# Altium PCB INS_CAN.PcbDoc
Units mil, origin at the board's own origin, x right, y up, seen from the top; angles counter-clockwise.
Board outline 1181.1 x 1181.1 mil, 2 copper layers (Top Layer, Bottom Layer), stack 62.992 mil thick; 50 components, 37 nets, 209 pads, 111 vias.
Unrouted connection lines stored in the file: 32.
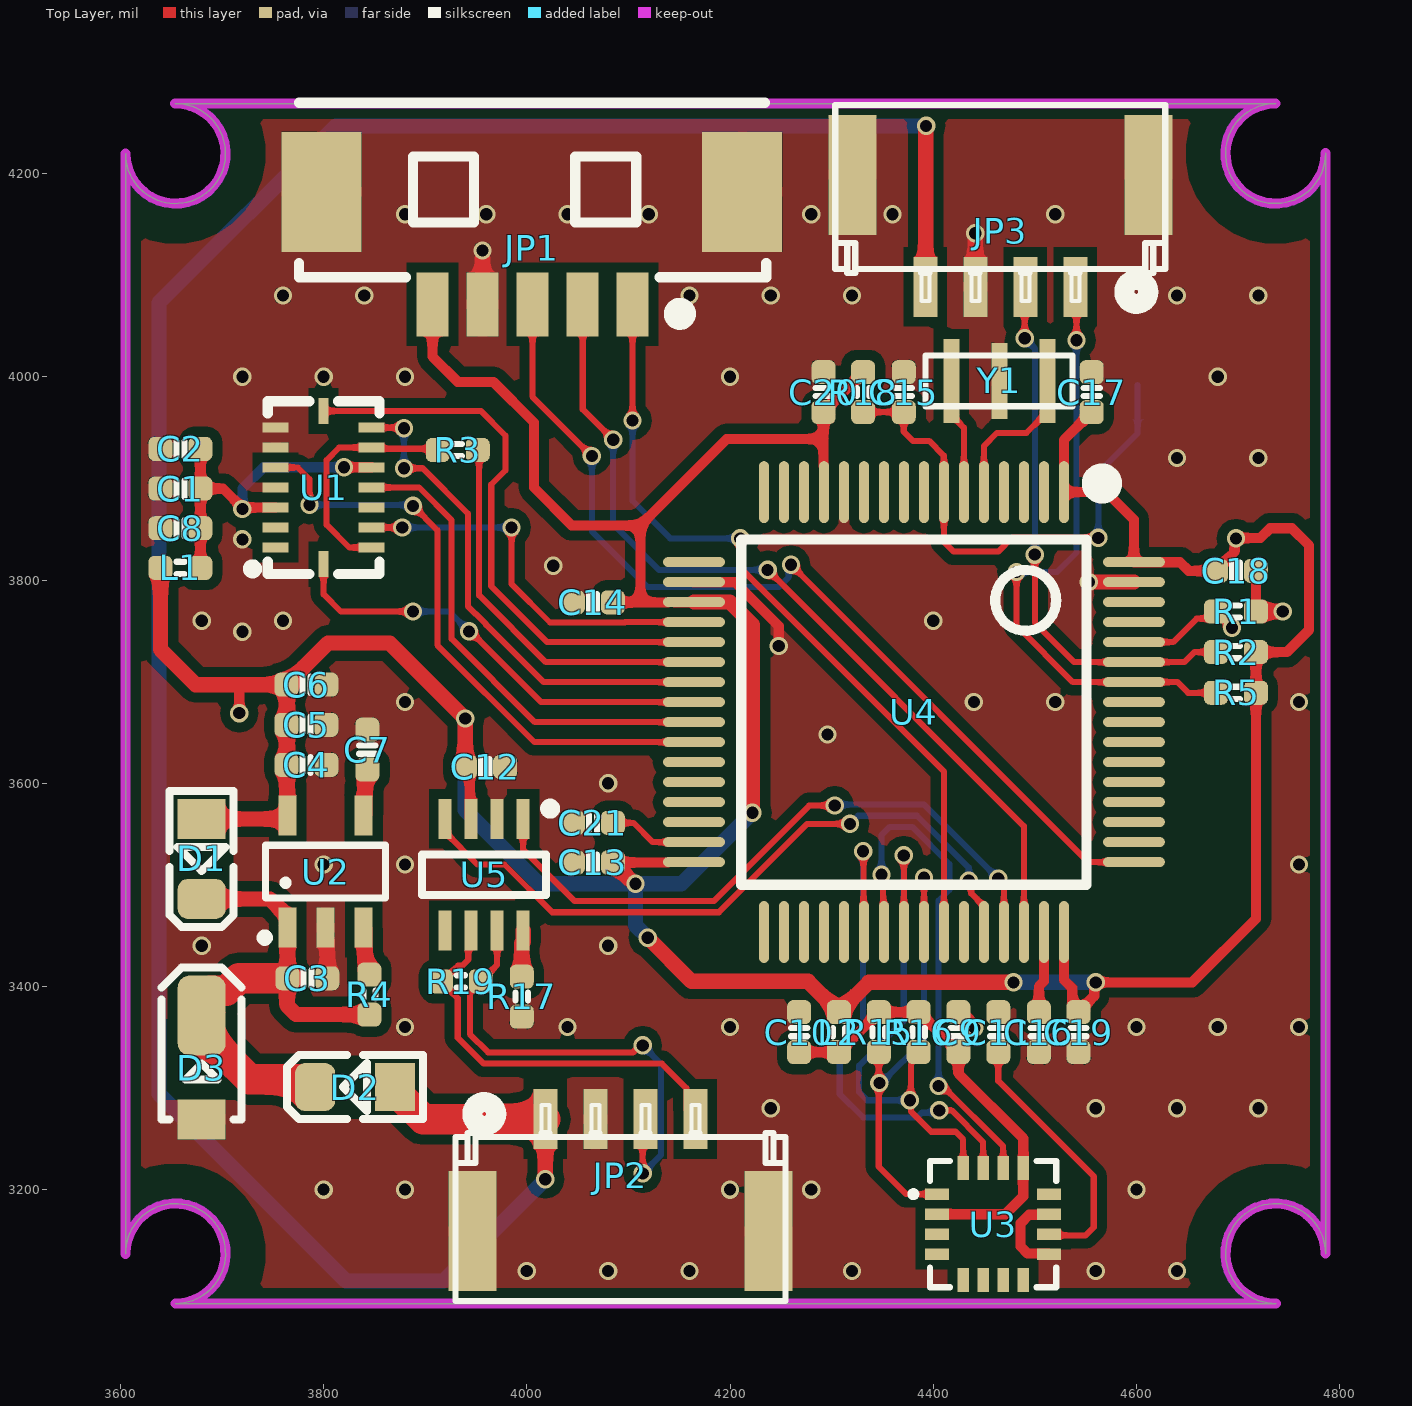
[diagram p0: Top Layer view]
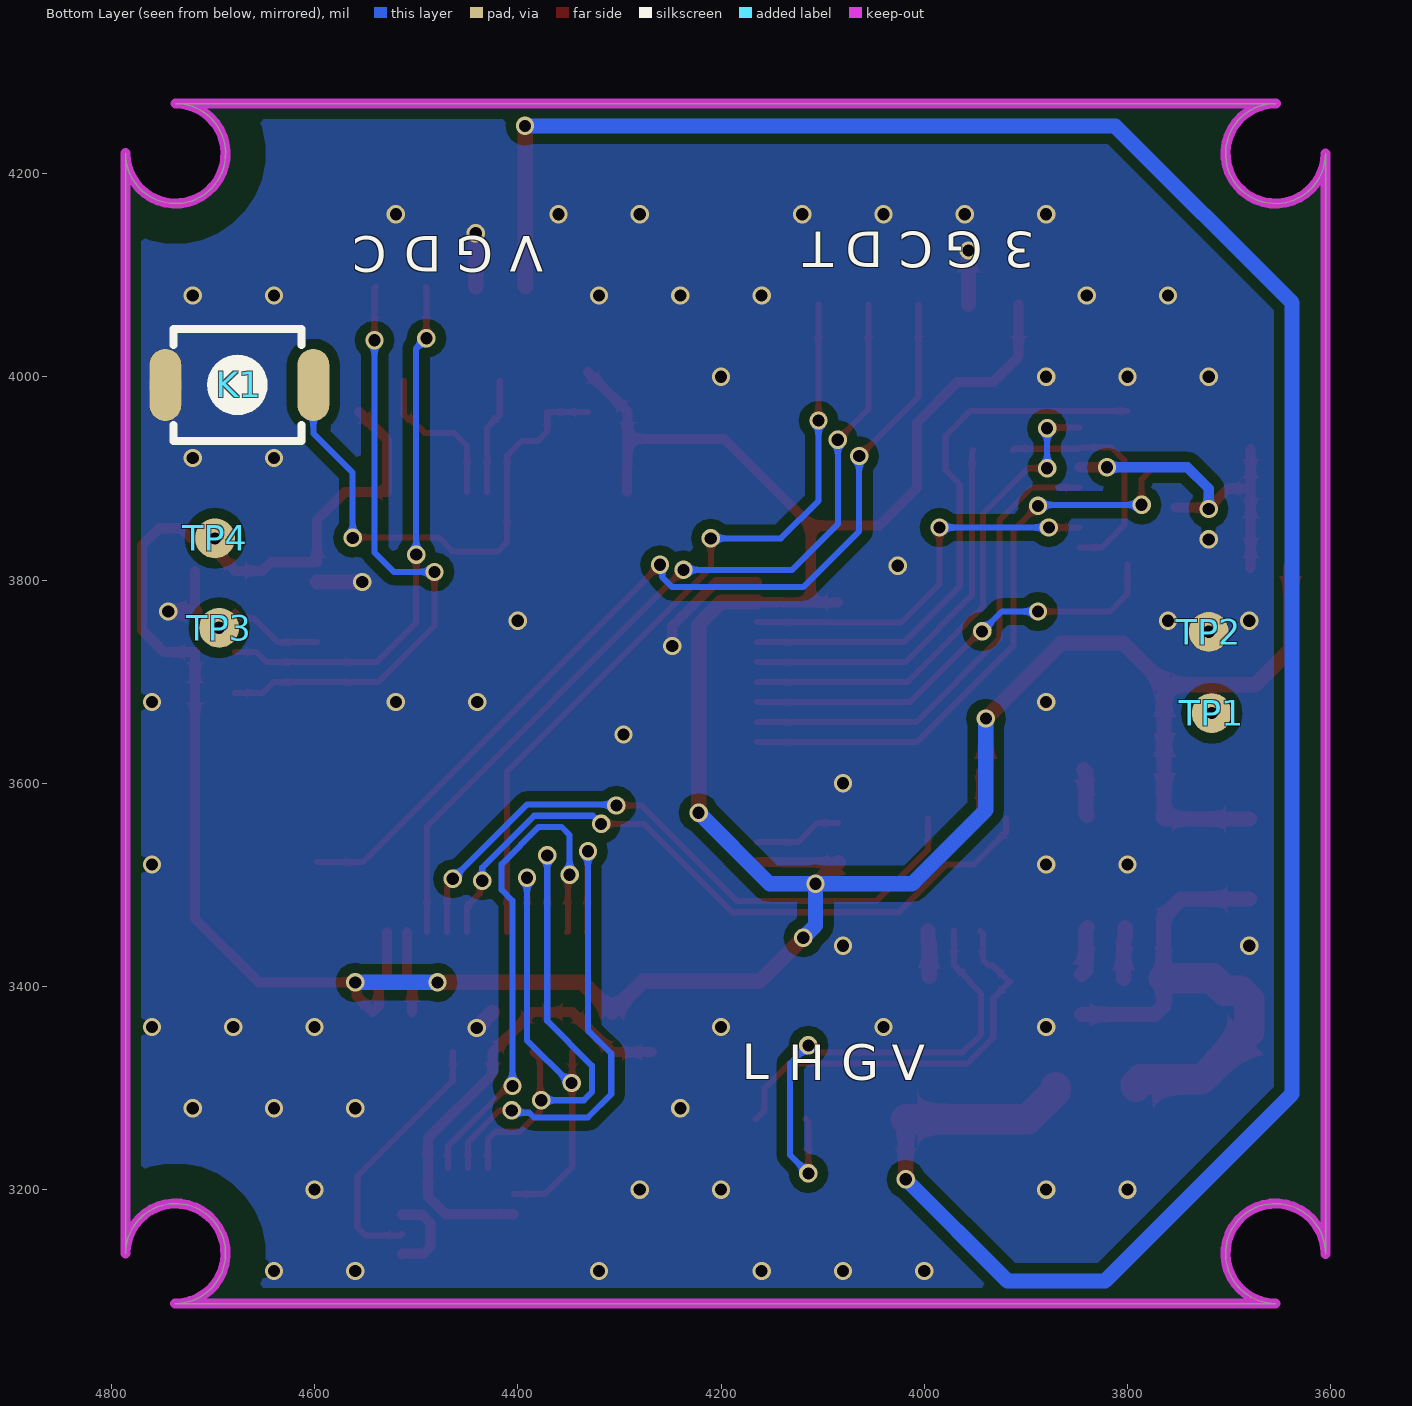
[diagram p1: Bottom Layer view, seen from below]
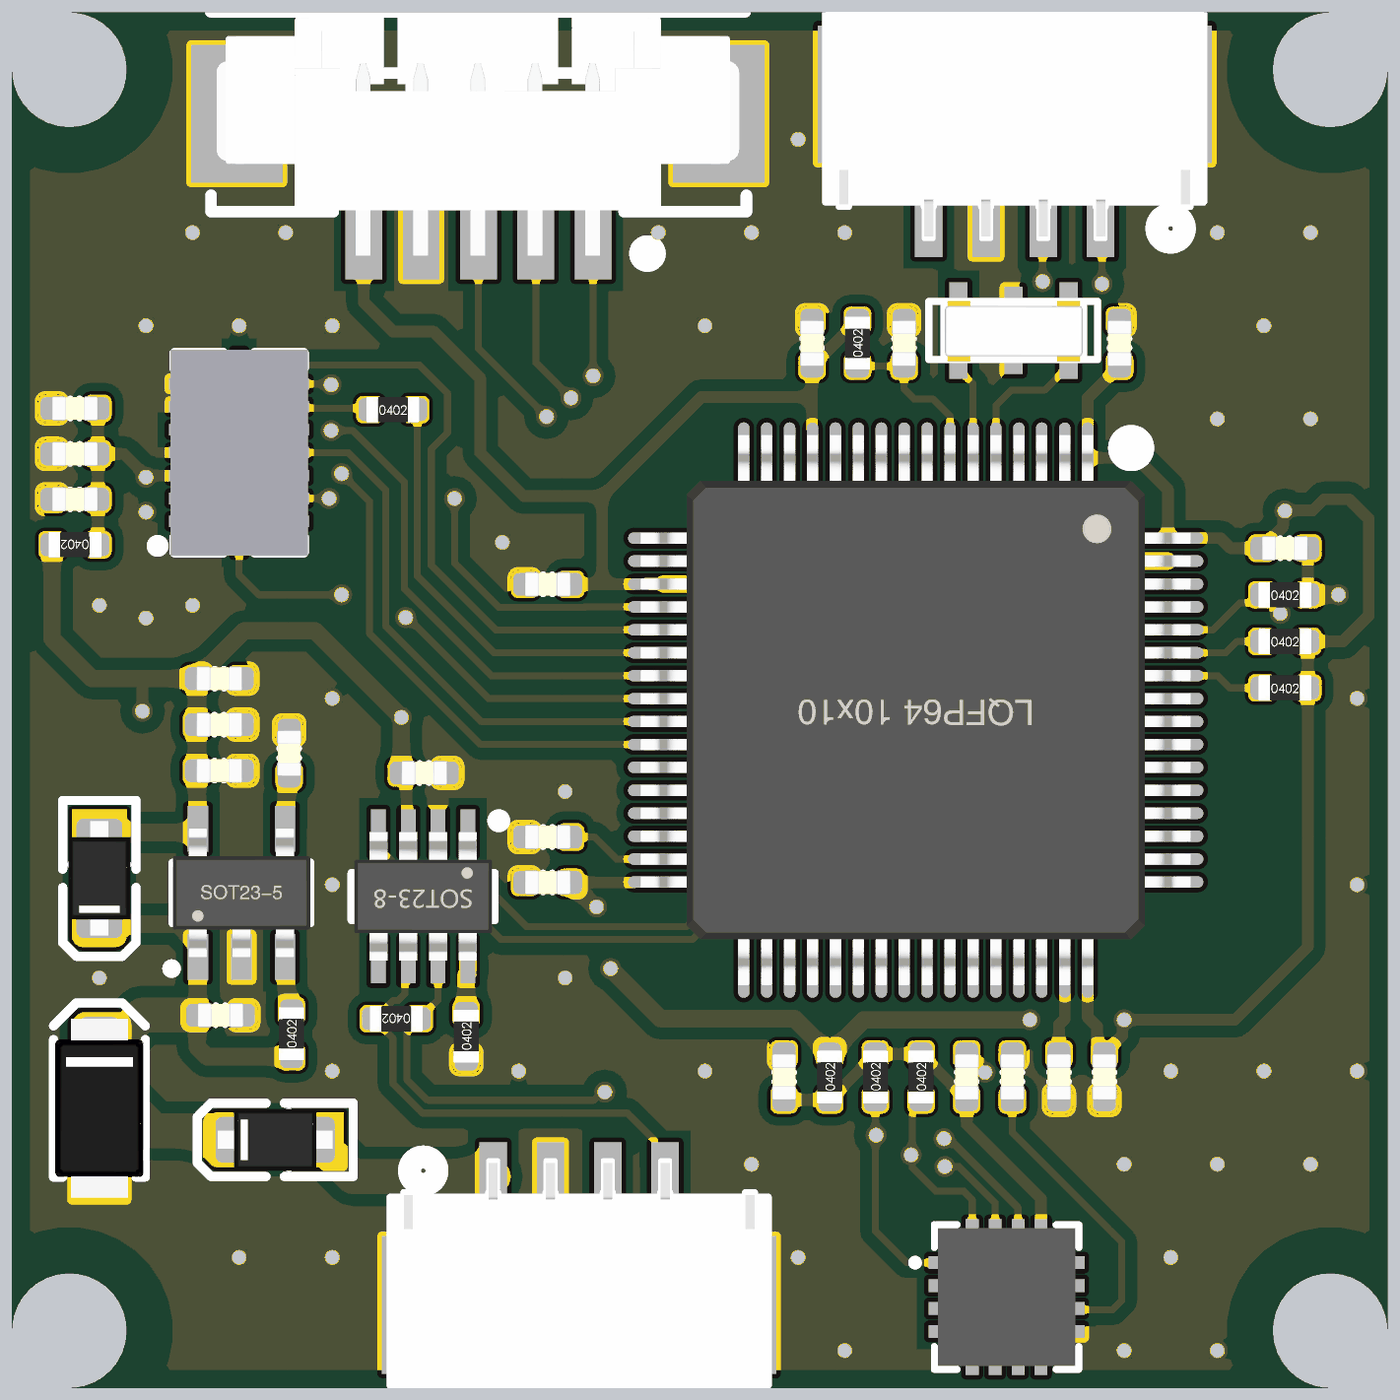
[diagram p2: 3D render of the assembled board from above, using the file's embedded part models]

## Layer stack, top to bottom
Top Solder: solder mask 0.4, Solder Resist, Dk 3.5
Top Layer: signal copper 1.9685
Dielectric 1: dielectric 59.0551, FR-4, Dk 4.8
Bottom Layer: signal copper 1.9685
Bottom Solder: solder mask 0.4, Solder Resist, Dk 3.5

## Board outline
3605,3136.9 3605,4219.79 ccw(c3654.21,4219.79) 3654,4269 4736.89,4269 ccw(c4736.89,4219.79) 4786.1,4220 4786.1,3137.11 ccw(c4736.89,3137.11) 4737.1,3087.9 3654.21,3087.9 ccw(c3654.21,3137.11)

## Design rules (kind name [scope] priority, off if disabled: settings)
AssemblyTestPointUsage [All] p1 off:
AssemblyTestpoint [All] p1 off: testpointundercomponent=TRUE minsize=40 maxsize=100 preferedsize=60 minholesize=0 maxholesize=40 preferedholesize=32 testpointgrid=1 usegrid=TRUE gridtolerance=0.01 allowsidetop=TRUE allowsidebottom=TRUE
Clearance Clearance_1 [InPolygon] p1: gap=10 ignorepadtopadclearanceinfootprint=FALSE
Clearance [All] p2: gap=5 ignorepadtopadclearanceinfootprint=FALSE
ComponentClearance [All] p1 off: gap=10 collisioncheckmode=3 verticalgap=10 showdistances=FALSE
DiffPairsRouting [All] p1 off: maxlimit=10 minlimit=6 mostfreqgap=6 toplayer_minwidth=6 toplayer_maxwidth=15 toplayer_prefwidth=6 bottomlayer_minwidth=6 bottomlayer_maxwidth=15 bottomlayer_prefwidth=6 maxuncoupledlength=500
FabricationTestPointUsage [All] p1 off: valid=0 allowmultiple=FALSE
FabricationTestpoint [All] p1 off: side=3 testpointundercomponent=TRUE minsize=40 maxsize=100 preferedsize=60 minholesize=0 maxholesize=40 preferedholesize=32 testpointgrid=1 allowsidetop=TRUE allowsidebottom=TRUE usegrid=TRUE gridtolerance=0.01
FanoutControl Fanout_BGA [IsBGA] p1 off: bgadir=Out bgaviamode=Centered fanoutstyle=Auto fanoutdirection=Alternating viagrid=1 // Fanout_BGA (Default Rule)
FanoutControl Fanout_LCC [IsLCC] p2 off: bgadir=Out bgaviamode=Centered fanoutstyle=Auto fanoutdirection=Alternating viagrid=1 // Fanout_LCC (Default Rule)
FanoutControl Fanout_SOIC [IsSOIC] p3 off: bgadir=Out bgaviamode=Centered fanoutstyle=Auto fanoutdirection=Alternating viagrid=1 // Fanout_SOIC (Default Rule)
FanoutControl Fanout_Small [(CompPinCount < 5)] p4 off: bgadir=Out bgaviamode=Centered fanoutstyle=Auto fanoutdirection=OutThenIn viagrid=1 // Fanout_Small (Default Rule)
FanoutControl Fanout_Default [All] p5 off: bgadir=Out bgaviamode=Centered fanoutstyle=Auto fanoutdirection=Alternating viagrid=1 // Fanout_Default (Default Rule)
Height [All] p1 off: minheight=0 maxheight=1000 prefheight=500
HoleSize [All] p1 off: absolutevalues=TRUE maxlimit=100 minlimit=1 maxpercent=80.000 minpercent=20.000
HoleToHoleClearance [All] p1 off: gap=10 allowstackedmicrovias=TRUE
LayerPairs [All] p1 off: enforce=TRUE
MinimumSolderMaskSliver [All] p1 off: minsoldermaskwidth=10
NetAntennae [All] p1 off: netantennaetolerance=0
PasteMaskExpansion [All] p1 off: expansion=0
PlaneClearance [All] p1 off: clearance=30
PlaneConnect [All] p1 off: planeconnectstyle=Direct reliefexpansion=10 reliefentries=4 reliefconductorwidth=10 reliefairgap=5
PolygonConnect [All] p1 off: connectstyle=Direct reliefconductorwidth=10 reliefentries=4 polygonreliefangle="90 Angle" airgapwidth=10
RoutingCorners [All] p1 off: cornerstyle=45-Degree minsetback=100 maxsetback=100
RoutingLayers [All] p1 off: top layer_v5=TRUE bottom layer_v5=TRUE
RoutingPriority [All] p1 off: routingpriority=0
RoutingTopology [All] p1 off: topology=Shortest
RoutingVias [All] p1 off: holewidth=10 width=18 viastyle="Through Hole" minholewidth=5 minwidth=5 maxholewidth=100 maxwidth=100
SilkToSilkClearance [All] p1 off: silktosilkclearance=10
SilkToSolderMaskClearance [IsPad] p1 off: minsilkscreentomaskgap=10 clearancetoexposedcopper=TRUE
SolderMaskExpansion [All] p1 off: expansion=4 istentingtop=FALSE
Width [All] p1 off: maxlimit=1000 minlimit=5 preferedwidth=10
4 further rules are at their usual default settings.

## Components (designator, comment, footprint, x,y, rotation, side; value= is the part's Value field where it differs from the comment)
C1 "10uF" C0402 3659,3890 r180 top value=0.1u
C2 "0.1uF" C0402 3659,3929 r180 top value=0.1u
C3 "1uF/25V" C0402 3784,3408 r180 top value=0.1u
C4 "0.1uF/50V" C0402 3783,3618 r180 top value=0.1u
C5 "1uF/25V" C0402 3783,3657.5 r180 top value=0.1u
C6 "0.1uF/50V" C0402 3783,3697 r180 top value=0.1u
C7 "10nF/50V" C0402 3843,3633 r270 top value=0.1u
C8 "0.1uF" C0402 3659,3851 r180 top value=0.1u
C9 "0.1uF" C0402 4424.8,3355 r90 top value=0.1u
C10 "0.1uF" C0402 4268,3355 r90 top value=0.1u
C11 "4.7uF" C0402 4464,3355 r90 top value=0.1u
C12 "0.1uF/50V" C0402 3959,3616 r180 top value=0.1u
C13 "0.1uF" C0402 4065,3522 r180 top value=0.1u
C14 "0.1uF" C0402 4065,3778 r180 top value=0.1u
C15 "0.1uF/50V" C0402 4371,3985 r270 top value=0.1u
C16 "2.2uF" C0402 4504,3355 r270 top value=0.1u
C17 "0.1uF" C0402 4556,3985 r90 top value=0.1u
C18 "0.1uF" C0402 4698,3809 r0 top value=0.1u
C19 "0.1uF" C0402 4543,3355 r270 top value=0.1u
C20 "0.1uF" C0402 4292,3985 r90 top value=0.1u
C21 "2.2uF" C0402 4065,3561 r180 top value=0.1u
D1 "1N5819" D_SOD323 3680,3525.5 r270 top
D2 "1N5819" D_SOD323 3831,3301 r180 top
D3 "SMFJ5.0A" D_SOD123A 3680,3328 r90 top
JP1 "HDR-1X5" "MX 1.25-WS-5P" 4005,4182 r180 top
JP2 "SWD" GH1.25-WS-4P 4092,3171 r180 top
JP3 "SWD" GH1.25-WS-4P 4466,4187 r0 top
K1 "6x6x5" SWPBS_SPST_3X2X1 4676,3992 r180 bottom
L1 "60R 25% 3A" R0402 3659,3812 r180 top
L2 "60R 25% 3A" R0402 4307.2,3355 r90 top
R1 "10K" R0402 4698,3769 r0 top value=22R
R2 "4.7K" R0402 4698,3729 r0 top value=22R
R3 "33R" R0402 3932,3928 r0 top value=22R
R4 "100K" R0402 3845,3392 r90 top value=22R
R5 "4.7K" R0402 4698,3689 r0 top value=22R
R15 "4.7K" R0402 4346.4,3355 r90 top value=22R
R16 "4.7K" R0402 4385.6,3355 r90 top value=22R
R17 "0R" R0402 3995,3390 r90 top value=22R
R18 "10K" R0402 4331,3985 r90 top value=22R
R19 "120R/NC" R0402 3935,3405 r180 top value=22R
TP1 "TEST" "TEST 1" 3717,3669 r270 bottom
TP2 "TEST" "TEST 1" 3720,3749 r270 bottom
TP3 "TEST" "TEST 1" 4694,3753 r0 bottom
TP4 "TEST" "TEST 1" 4698,3841 r0 bottom
U1 "BMI088" "QFN16 BMI" 3800,3891 r0 top
U2 "LP5907 3V3" SOT23-5L 3802,3513 r0 top
U3 "IST8310" QFN50_16T_3X3_IST 4459,3166 r270 top
U4 "STM32F405RGT6V" "LQFP64 10x10_L" 4381,3670 r180 top
U5 "MAX3051EKA+T" SOT23-8L 3958,3510 r180 top
Y1 "8MHz" CSTCE3213 4437.24,3921 r270 top

## Footprints (in the part's own frame and the unit in brackets; to place one, negate y for a bottom-side part, rotate by r counter-clockwise, add the part's x,y. Pads: shape width x height; smd on the part's side, far side on the other; paste and mask are expansions set on the pad)
C0402 [mm] "CHIP Capacitor, 1.0X0.5mm, 0402"
  rrect50% 0.6x0.6 smd paste-0.05 mask+0.075: 1(-0.5,0) 2(0.5,0)
  silkscreen extent -0.1,-0.2 0.1,0.2, body extent -0.5,-0.26 0.5,0.27, height 0.36
CSTCE3213 [mm]
  rect 2.1x0.4 smd: 1(-1.905,1.905) 3(-1.905,-0.495)
  rect 1.9x0.4 smd: 2(-1.905,0.705)
  silkscreen extent -2.54,-1.14 -1.27,2.54, body extent -2.55,-0.89 -1.23,2.31, height 0.9
D_SOD123A [mm] "PowerDI-123, SOD123, DO-213AA, 1206D"
  rect 1x1.2 smd paste-0.1 mask+0.1: 1(-1.5,0)
  rrect50% 2x1.2 smd paste-0.1 mask+0.1: 2(1.1,0)
  Top Layer pour cut-out: -1.016,1.1 -1.016,-1.1 1.016,-1.1 1.016,1.1
  silkscreen extent -1.5,-1 2.3,1, body extent -1.95,-0.97 1.95,0.96, height 1
D_SOD323 [mm] "DIODE0805, SOD-323, SC-76, DL-35, 0805 similar size"
  rect 1x1.2 smd paste-2 mask+0.075: 1(-1,0)
  rrect50% 1x1.2 smd paste-2 mask+0.075: 2(1,0)
  Top Layer pour cut-out: -0.5,0.8 0.5,0.8 0.5,-0.8 -0.5,-0.8
  silkscreen extent -1.7,-0.8 1.7,0.8, body extent -1.25,-0.68 1.25,0.67, height 1
GH1.25-WS-4P [mm] "A1257WR-S-4P"
  rect 1.2x3 smd: 0(-3.7,0.3) 0(3.7,0.3)
  rect 0.6x1.5 smd: 1(1.875,-2.5) 2(0.625,-2.5) 3(-0.625,-2.5) 4(-1.875,-2.5)
  silkscreen extent -4.13,-2.93 4.12,2.05, body extent -4.12,-2.8 4.12,2.1, height 4.4
"LQFP64 10x10_L" [mm] "64脚，体宽10x10mm，脚距0.5mm"
  oval 0.25x1.55 smd: 1(-3.75,-5.5) 2(-3.25,-5.5) 3(-2.75,-5.5) 4(-2.25,-5.5) 5(-1.75,-5.5) 6(-1.25,-5.5) 7(-0.75,-5.5) 8(-0.25,-5.5) 9(0.25,-5.5) 10(0.75,-5.5) 11(1.25,-5.5) 12(1.75,-5.5) 13(2.25,-5.5) 14(2.75,-5.5) 15(3.25,-5.5) 16(3.75,-5.5) 33(3.75,5.5) 34(3.25,5.5) 35(2.75,5.5) 36(2.25,5.5) 37(1.75,5.5) 38(1.25,5.5) 39(0.75,5.5) 40(0.25,5.5) 41(-0.25,5.5) 42(-0.75,5.5) 43(-1.25,5.5) 44(-1.75,5.5) 45(-2.25,5.5) 46(-2.75,5.5) 47(-3.25,5.5) 48(-3.75,5.5)
  oval 1.55x0.25 smd: 17(5.5,-3.75) 18(5.5,-3.25) 19(5.5,-2.75) 20(5.5,-2.25) 21(5.5,-1.75) 22(5.5,-1.25) 23(5.5,-0.75) 24(5.5,-0.25) 25(5.5,0.25) 26(5.5,0.75) 27(5.5,1.25) 28(5.5,1.75) 29(5.5,2.25) 30(5.5,2.75) 31(5.5,3.25) 32(5.5,3.75) 49(-5.499,3.75) 50(-5.499,3.25) 51(-5.499,2.75) 52(-5.499,2.25) 53(-5.499,1.75) 54(-5.499,1.25) 55(-5.499,0.75) 56(-5.499,0.25) 57(-5.499,-0.25) 58(-5.499,-0.75) 59(-5.499,-1.25) 60(-5.499,-1.75) 61(-5.499,-2.25) 62(-5.499,-2.75) 63(-5.499,-3.25) 64(-5.499,-3.75)
  silkscreen extent -4.95,-5.96 4.32,4.32, body extent -6,-6 6,6, height 1.45
"MX 1.25-WS-5P" [mm] "长：11.4mm，宽：4.2mm，高：3.4mm"
  rect 2x3 smd: 0(-5.257,0) 0(5.257,0)
  rect 0.8x1.6 smd: 1(-2.514,2.811) 2(-1.264,2.811) 3(-0.014,2.811) 4(1.236,2.811) 5(2.486,2.811)
  silkscreen extent -5.86,-2.23 5.83,3.25, body extent -5.7,-2.1 5.7,3.09, height 3.4
"QFN16 BMI" [mm] "16脚，长x宽x高：4x4x0.8mm，脚距：0.65mm"
  rect 0.65x0.25 smd: 1(-1.2,-1.498) 2(-1.2,-0.998) 3(-1.2,-0.498) 4(-1.2,0.002) 5(-1.2,0.502) 6(-1.2,1.002) 7(-1.2,1.502) 9(1.2,1.502) 10(1.2,1.002) 11(1.2,0.502) 12(1.2,0.002) 13(1.2,-0.498) 14(1.2,-0.998) 15(1.2,-1.498)
  rect 0.25x0.65 smd: 8(0,1.915) 16(0,-1.915)
  silkscreen extent -1.89,-2.16 1.4,2.16, body extent -1.5,-2.25 1.5,2.25, height 0.88
QFN50_16T_3X3_IST [mm] "RGT PVQFN (TI), 16-lead, pitch: 0.5mm, 3x3mm"
  rect 0.28x0.6 smd: 1(-0.75,-1.4) 2(-0.25,-1.4) 3(0.25,-1.4) 4(0.75,-1.4) 9(0.75,1.4) 10(0.25,1.4) 11(-0.25,1.4) 12(-0.75,1.4)
  rect 0.6x0.28 smd: 5(1.4,-0.75) 6(1.4,-0.25) 7(1.4,0.25) 8(1.4,0.75) 13(-1.4,0.75) 14(-1.4,0.25) 15(-1.4,-0.25) 16(-1.4,-0.75)
  silkscreen extent -1.58,-2.07 1.58,1.58, body extent -1.5,-1.5 1.5,1.5, height 1
R0402 [mm] "CHIP Resistor, 1.0X0.5mm, 0402"
  rrect50% 0.6x0.6 smd paste-0.05 mask+0.075: 1(-0.5,0) 2(0.5,0)
  silkscreen extent -0.1,-0.15 0.1,0.15, body extent -0.57,-0.27 0.58,0.28, height 0.41
SOT23-5L [mm] "3x1.6x1.1mm(长宽高)"
  rect 0.45x1 smd: 1(-0.95,-1.4) 2(0,-1.4) 3(0.95,-1.4) 4(0.95,1.4) 5(-0.95,1.4)
  silkscreen extent -1.6,-1.73 1.5,0.66, body extent -1.5,-1.4 1.5,1.4, height 1.15
SOT23-8L [mm] "3x1.6x1.1mm(长宽高)"
  rect 0.325x1 smd: 1(-0.975,-1.397) 2(-0.325,-1.397) 3(0.325,-1.397) 4(0.975,-1.397) 5(0.975,1.397) 6(0.325,1.397) 7(-0.325,1.397) 8(-0.975,1.397)
  silkscreen extent -1.78,-1.78 1.55,0.51, body extent -1.5,-1.4 1.5,1.4, height 1.15
SWPBS_SPST_3X2X1 [mm] "SWITCH, PUSHBUTTON, SMD, SPST, 3X2.5mm"
  oval 0.8x1.8 smd mask+0.1: 1(-1.8,0) 2(1.9,0)
  silkscreen extent -1.6,-1.4 1.6,1.4, body extent -2,-1.25 2,1.25, height 1.6
"TEST 1" [mm] "测试点1mm"
  round 1 smd paste-1: 1(0,0)

## Part data
C1 C2 C3 C4 C5 C6 C7 C8 C9 C10 C11 C12 C13 C14 C15 C16 C17 C18 C19 C20 C21: library part 电容-0402, "Capacitor"
D1 D2: library part Diode_SMA, "Diode", Type=SMA
D3: library part SMBJ28CA
JP1: library part "Header 5", "5P接插件", BOM名称=5P接插件, 学习资源=www.ooocke.com, 版权归属=源创客
JP2 JP3: library part "Header 1*4"
K1: library part "TSW DIP-6x6_V", "侧按直插6x6轻触开关", BOM名称=直插6x6轻触开关, 学习资源=www.ooocke.com, 版权归属=源创客
L1 L2: library part L, "小功率贴片电感", BOM名称=小功率贴片电感, 学习资源=www.ooocke.com, 版权归属=源创客
R1 R2 R3 R4 R5 R15 R16 R17 R18 R19: library part 电阻-0402, "Resistor"
TP1 TP2 TP3 TP4: "测试点", BOM名称=测试点, 学习资源=www.ooocke.com, 版权归属=源创客
U1: BOM_JLCPCB Part Class="Extended Part", BOM_Manufacturer="Bosch Sensortec", BOM_Manufacturer Part=BMI088, BOM_Supplier=LCSC, BOM_Supplier Part=C194919, Contributor=LCSC, spicePre=U, spiceSymbolName=BMI088
U2: library part LP2992, "LDO"
U4: JLCPCB Part Class=扩展库, Manufacturer=ST(意法半导体), Add into BOM=yes, Convert to PCB=yes, Datasheet=https://atta.szlcsc.com/upload/public/pdf/source/20201130/C919362_39400D478C258148B3DF984CE4A4041A.pdf, Device=STM32F405RGT6V, LCSC Part Name=STM32F405RGT6V, Manufacturer Part=STM32F405RGT6V, Name=STM32F405RGT6V, Supplier=LCSC, Supplier Footprint=LQFP-64(10x10), Supplier Part=C1338696, Symbol=STM32F405RGT6V
U5: BOM_JLCPCB Part Class="Extended Part", BOM_Manufacturer=MAXIM, BOM_Manufacturer Part=MAX3051EKA+T, BOM_Supplier=LCSC, BOM_Supplier Part=C112005, spicePre=U, spiceSymbolName=MAX3051EKA+T
Y1: library part 晶振-3Pin, "村田贴片"
U3: Add into BOM=yes, Convert to PCB=yes, Device=IST8310, LCSC Part Name=IST8310, Manufacturer Part=IST8310, Name=IST8310, Supplier=LCSC, Supplier Footprint=LGA-16, Supplier Part=C9900047266, Symbol=IST8310

## Via types
v1: diameter 18, hole 12, Top Layer to Bottom Layer, tented both sides, 111 vias

## Nets (pads, with @x,y where several pads share a name; then routed paths per layer and width w, separated by ;. In a path a pad name is that pad's centre, name@x,y a point inside that pad or via, vN(x,y) a via of type N, cw(c..) or ccw(c..) an arc to the next point about the centre after c; other vN are vias at no path point)
3V3: C4.2 C5.2 C6.2 C12.2 C13.1 C14.1 C17.1 C18.1 C19.1 C20.1 D1.1 JP1.5 L1.2 L2.2 R2.2 R5.2 R18.2 TP1.1 TP4.1 U2.5 U4.1 U4.13 U4.19 U4.32 U4.48 U4.64 U5.3 | length 4124
  Top Layer w10: v1(3717,3669) 3717,3695.34 3718.66,3697 ; JP1.5 3907.12,4019.88 3932,3995 3967,3995 4007,3955 4007,3891 4044.27,3853.73 4111.73,3853.73 ; C12.2 3943.81,3611.51 3943.81,3566.4 U5.3 ; C13.1 4138.67,3522 4139.04,3522.37 U4.32 ; C14.1 4111.73,3778 ; U4.19 4139.04,3778.27 4138.77,3778 4111.73,3778 ; U4.13 4292.41,3911.96 4292,3912.36 4292,3938.84 ; R18.2 4331,4004.5 4292,3965.5 C20.1 4292,3938.84 ; U4.48 4528.63,3406.37 4536.75,3398.25 4536.75,3380.94 C19.1 4543,3375.18 4558.47,3390.64 4558.47,3402.47 v1(4560,3404) 4655,3404 4717.69,3466.68 R5.2 R2.2 4748,3729 4770,3751 4770,3834 4753,3851 4731.58,3851 4722,3841.42 4698.42,3841.42 v1(4698,3841) 4696.47,3839.47 4696.47,3827.64 4678.31,3809.49 C18.1 4651.5,3809 4642.94,3817.56 4597.59,3817.56 U4.64 4597.51,3859.49 4570.48,3886.52 U4.1 4528.63,3937.94 C17.1 ; 4111.73,3778 4111.73,3853.73 ; 4111.73,3853.73 4196.84,3938.84 4292,3938.84
  Top Layer w15: L1.2 3639.32,3731.68 3674,3697 3718.66,3697 C6.2 ; D1.1 3763.24,3564.87 3764.6,3566.23 U2.5 3763.96,3568.76 3763.96,3696.36 C6.2 ; C12.2 v1(3939.32,3663.68) 3865,3738 3804.32,3738 C6.2 ; C13.1 4105.11,3501.57 4106.43,3501.57 v1(4107,3501) ; v1(4119,3448) 4162,3405 4276.89,3405 L2.2 4336.52,3404 v1(4479,3404) ; U4.19 4199.73,3778.27 4222,3756 v1(4222,3571)
  Bottom Layer w15: v1(3939.32,3663.68) 3939.32,3573.68 4012,3501 v1(4107,3501) ; v1(4119,3448) 4107,3460 v1(4107,3501) ; v1(4222,3571) 4152,3501 v1(4107,3501) ; v1(4479,3404) v1(4560,3404)
5V: C3.2 D1.2 D2.2 D3.2 R4.1 U2.1 | length 524.6
  Top Layer w15: D1.2 3747.18,3486.13 3764.46,3468.85 3764.46,3408.14 C3.2 3764,3407.68 3764,3381.1 3772.79,3372.32 R4.1
  Top Layer w30: C3.2 3716.69,3408 3704.37,3395.68 3688.62,3395.68 3680,3387.06 D3.2 3680,3355.56 3726.94,3308.61 3786.94,3308.61 3791.63,3303.93 D2.2
AS_SCL: JP3.1 R5.1 U4.58 | length 605.6
  Top Layer w6: v1(4482,3808) 4482,3755 4537.47,3699.53 U4.58 4640.47,3699.53 4651,3689 R5.1 ; JP3.1 4541,4087.39 v1(4541,4036)
  Bottom Layer w6: v1(4482,3808) 4522,3808 4541,3827 v1(4541,4036)
AS_SDA: JP3.2 R2.1 U4.59 | length 533.4
  Top Layer w6: v1(4490,4038) 4490,4087.97 JP3.2 ; v1(4500,3825) 4500,3758 4538.78,3719.22 U4.59 4647.22,3719.22 4657,3729 R2.1
  Bottom Layer w6: v1(4490,4038) 4500,4028 v1(4500,3825)
BOOT0: R1.1 TP3.1 U4.60 | length 115.8
  Top Layer w6: U4.60 4636.1,3738.9 4659.18,3761.98 4671.3,3761.98 R1.1 4678.31,3768.84 4694,3753.16 v1(4694,3753)
CAN_D: U4.45 U5.1 | length 643.3
  Top Layer w6: U5.1 3996.39,3534.67 4047.06,3484 4184,3484 4278,3578 v1(4303,3578) ; v1(4464,3506) 4464,3502.75 4469.57,3497.18 U4.45
  Bottom Layer w6: v1(4303,3578) 4304,3579 4391,3579 v1(4464,3506)
CAN_H: JP2.3 R19.1 U5.7 | length 488.9
  Top Layer w6: U5.7 3970.8,3421.11 R19.1 3954.68,3403.43 3944,3392.74 3944,3353 3962,3335 4104.49,3335 4111.49,3342 v1(4114,3342) ; v1(4114,3216) 4114,3266.82 JP2.3
  Bottom Layer w6: v1(4114,3216) 4132,3234 4132,3324 v1(4114,3342)
CAN_L: JP2.4 R19.2 U5.6 | length 407.9
  Top Layer w6: U5.6 3942.31,3452.11 3942.31,3426.31 3936.5,3420.5 3932.39,3420.5 3916.89,3405 R19.2 3932,3388.32 3932,3349.44 3957.44,3324 4133,3324 4157.01,3299.99 4157.01,3278.24 JP2.4
CAN_R: U4.44 U5.4 | length 691.4
  Top Layer w6: U5.4 3919.61,3551.71 3951.33,3520 3978,3520 4025,3473 4189,3473 4276,3560 v1(4318,3560) ; v1(4435,3504) 4437.3,3501.7 4437.3,3491.67 4449.89,3479.07 U4.44
  Bottom Layer w6: v1(4318,3560) 4326,3568 4384,3568 4435,3517 v1(4435,3504)
GND: C1.2 C2.2 C3.1 C4.1 C5.1 C6.1 C7.1 C8.2 C9.2 C10.2 C11.2 C12.1 C13.2 C14.2 C15.1 C16.2 C17.2 C18.2 C19.2 C20.2 C21.2 D3.1 JP1.0 JP1.4 JP2.0 JP2.2 JP3.0 JP3.3 K1.1 R1.2 R17.1 TP2.1 U1.4 U1.6 U1.7 U2.2 U3.9 U3.11 U4.12 U4.18 U4.63 U5.2 Y1.2 | length 496.5
  Top Layer w10: U4.18 4164.55,3797.88 4204.87,3797.88 4248,3754.75 v1(4248,3735) ; U3.9 4513.61,3136.98 4493.02,3136.98 4486,3144 4486,3167 4494.33,3175.33 4513.61,3175.33 U3.11 ; R1.2 C18.2
  Top Layer w15: U2.2 3802,3447.06 3803.68,3445.37 C3.1 ; JP1.4 v1(3956.33,4124.33) ; C9.2 v1(4440.48,3359) ; JP3.3 v1(4441.39,4141.39) ; v1(4553.04,3797.96) U4.63 ; R1.2 v1(4744,3769)
  other v1: 4000,3120 4080,3120 4160,3120 4320,3120 4560,3120 4640,3120 3800,3200 3880,3200 4200,3200 4280,3200 4600,3200 4240,3280 4560,3280 4640,3280 4720,3280 3880,3360 4040,3360 4200,3360 4600,3360 4680,3360 4760,3360 3680,3440 4080,3440 3800,3520 3880,3520 4760,3520 4080,3600 4296,3648 3880,3680 4440,3680 4520,3680 4760,3680 3720,3749 3680,3760 3760,3760 4400,3760 4026,3814 3720,3840 4640,3920 4720,3920 3720,4000 3800,4000 3880,4000 4200,4000 4680,4000 3760,4080 3840,4080 4160,4080 4240,4080 4320,4080 4640,4080 4720,4080 3880,4160 3960,4160 4040,4160 4120,4160 4280,4160 4360,4160 4520,4160
IMU_CS1_Accel: U1.14 U4.20 | length 390.4
  Top Layer w6: U1.14 v1(3877.29,3851.71) ; v1(3985,3851.71) 3983,3849.71 3985,3847.71 3985,3796 4022.81,3758.19 4096.35,3758.19 4096.75,3758.59 U4.20
  Bottom Layer w6: v1(3877.29,3851.71) v1(3985,3851.71)
IMU_CS1_Gyro: U1.5 U4.26 | length 604.7
  Top Layer w6: U1.5 3774.56,3910.76 3786,3899.32 v1(3786,3874) ; v1(3888,3873) 3912,3849 3912,3736 4007.52,3640.48 U4.26
  Bottom Layer w6: v1(3786,3874) 3887,3874 v1(3888,3873)
IMU_INT1_Accel: U1.16 U4.24 | length 438.1
  Top Layer w6: U1.16 3800,3786 3817,3769 v1(3888,3769) ; v1(3943,3749.48) 3944.52,3749.48 4014.15,3679.85 U4.24
  Bottom Layer w6: v1(3888,3769) 3923.48,3769 v1(3943,3749.48)
IMU_INT1_Gyro: U1.12 U4.25 | length 481.4
  Top Layer w6: U1.12 3893.96,3891.08 3926,3859.04 3926,3742 4007.84,3660.16 U4.25
IMU_MISO: R3.2 U4.22 | length 382.3
  Top Layer w6: R3.2 3953,3926.68 3953,3785 4018.78,3719.22 U4.22
IMU_MOSI: U1.9 U4.23 | length 498
  Top Layer w6: U1.9 3847.31,3950.07 3878.32,3950.07 v1(3879,3949.39) ; v1(3879,3910) 3897.49,3910 3942,3865.49 3942,3774 3949.52,3766.48 3950.04,3766.48 3960,3756.52 3960,3756 4016.47,3699.53 U4.23
  Bottom Layer w6: v1(3879,3910) v1(3879,3949.39)
IMU_SCK: U1.8 U4.21 | length 565.2
  Top Layer w6: U1.8 3954.61,3966.39 3979,3942 3979,3908 3965,3894 3965,3794 4020.1,3738.9 U4.21
IST_DRDY: U3.15 U4.38 | length 520.6
  Top Layer w6: v1(4331,3533) 4331.39,3532.61 4331.39,3453.87 U4.38 ; v1(4406,3278) 4418,3278 4449.16,3246.84 U3.15
  Bottom Layer w6: v1(4331,3533) 4331,3357 4308,3334 4308,3294 4331,3271 4384.04,3271 4388.75,3275.7 4403.7,3275.7 v1(4406,3278)
IST_RSTN: U3.14 U4.39 | length 514.6
  Top Layer w6: v1(4349,3510) 4350.73,3508.27 4350.73,3454.22 U4.39 ; v1(4405.28,3302) 4409.56,3302 4468.84,3242.72 U3.14
  Bottom Layer w6: v1(4349,3510) 4349,3549 4357,3557 4379.44,3557 4416,3520.44 4416,3495 4405.28,3484.28 v1(4405.28,3302)
IST_SCL: R15.1 U3.1 U4.41 | length 456.6
  Top Layer w6: v1@4346.4,3305 R15.1 ; v1(4347,3305) 4346.4,3304.4 4346.4,3222.6 4373.47,3195.53 U3.1 ; U4.41 4390.92,3453.57 4390.92,3506.92 v1(4391,3507)
  Bottom Layer w6: v1(4347,3305) 4349,3305 4391,3347 v1(4391,3507)
IST_SDA: R16.1 U3.16 U4.40 | length 532.8
  Top Layer w6: v1(4371,3529) 4371.07,3528.93 4371.07,3453.56 U4.40 ; R16.1 4378.58,3328.3 4378.58,3323.57 4378,3322.99 4378,3277 4398,3257 4422,3257 4429.47,3249.53 U3.16
  Bottom Layer w6: v1(4371,3529) 4371,3366 4327,3322 4327,3296 4335,3288 v1(4377,3288)
NetC1_1: C1.1 C2.1 C8.1 L1.1 U1.3 U1.11 | length 354.8
  Top Layer w10: L1.1 C8.1 C1.1 ; C2.1 C1.1 ; U1.3 3719.6,3871.4 3701,3890 C1.1 ; v1(3820,3911) 3847,3911 U1.11
  Bottom Layer w10: v1(3720,3870) 3720,3890 3741,3911 v1(3820,3911)
NetC7_2: C7.2 U2.4 | length 46.7
  Top Layer w15: U2.4 3840.76,3569.48 3840.76,3611.07 C7.2
NetC9_1: C9.1 C10.1 L2.1 R15.2 R16.2 U3.2 U3.13 | length 449.8
  Top Layer w10: C10.1 L2.1 4307.2,3335.4 4346.4,3374.6 R15.2 R16.2 4385.6,3374.6 4424.8,3335.4 4424.8,3314.2 4488.53,3250.47 U3.13 4488.53,3193.53 4470.84,3175.84 U3.2
NetC11_1: C11.1 U3.10 | length 258.9
  Top Layer w6: C11.1 4464,3307 4558,3213 4558,3163 4550,3155 4515.28,3155 U3.10
NetC16_1: C16.1 U4.47 | length 80.8
  Top Layer w10: C16.1 4504,3400 4508.94,3404.94 U4.47
NetC21_1: C21.1 U4.31 | length 87.6
  Top Layer w6: C21.1 4105,3561 4123.95,3542.05 U4.31
NetR3_1: R3.1 U1.10 U1.15 | length 232.7
  Top Layer w6: U1.15 3825.28,3832.03 3803,3854.31 3803,3918.04 3815.41,3930.45 U1.10 3848.47,3929.22 3911.09,3929.22 R3.1
NetR4_2: R4.2 U2.3 | length 48.5
  Top Layer w15: U2.3 3840.76,3456.52 3840.76,3415.93 R4.2
NetR17_2: R17.2 U5.8 | length 45.9
  Top Layer w15: R17.2 3995,3442.53 3996.39,3443.92 U5.8
NetU4_5: U4.5 Y1.1 | length 153.9
  Top Layer w6: U4.5 4449.89,3931.89 4462.77,3944.77 4491.77,3944.77 4504.66,3957.66 4507.37,3957.66 4512.24,3962.54 Y1.1
NetU4_6: U4.6 Y1.3 | length 114.6
  Top Layer w6: Y1.3 4417.76,3962.54 4430.2,3950.09 U4.6
NRST: C15.2 K1.2 R18.1 U4.7 | length 522
  Top Layer w6: R18.1 C15.2 4371,3946 4380,3937 4396,3937 4410.52,3922.48 U4.7 4410.52,3837.48 4420,3828 4464,3828 4478,3842 4562,3842 v1(4562.5,3841.5)
  Bottom Layer w6: v1(4562.5,3841.5) 4562.5,3905.75 4601.2,3944.44 K1.2
SWCLK: JP1.3 U4.49 | length 941.3
  Top Layer w6: JP1.3 4005.54,3980.46 4062,3924 4062,3922 v1(4064,3922) ; v1(4260,3815) 4552.63,3522.37 U4.49
  Bottom Layer w6: v1(4064,3922) 4064,3848 4119,3793 4248.19,3793 4257.7,3802.51 4257.7,3812.7 v1(4260,3815)
SWDIO: JP1.2 U4.46 | length 860.5
  Top Layer w6: JP1.2 4055,4071.1 4055,3968 v1(4085,3938) ; v1(4237,3810) 4489.26,3557.74 U4.46
  Bottom Layer w6: v1(4085,3938) 4085,3855 4130,3810 v1(4237,3810)
UART1_Tx: JP1.1 U4.42 | length 786.1
  Top Layer w6: v1(4104,3957) JP1.1 ; v1(4210,3841) 4210,3812.19 4410.52,3611.67 U4.42
  Bottom Layer w6: v1(4104,3957) 4104,3878 4141,3841 4208,3841 4209,3842 v1(4210,3841)
VCC: D2.1 JP2.1 JP3.4 | length 2485.2
  Top Layer w15: v1(4018.18,3210.18) JP2.1 ; JP3.4 4392.59,4088.98 4392.59,4246.59 v1(4393,4247)
  Top Layer w30: D2.1 3870.37,3297.06 3898.01,3269.43 JP2.1
  Bottom Layer w15: v1(4018.18,3210.18) 3918,3110 3822,3110 3638,3294 3638,4073 3812,4247 v1(4393,4247)
pads on no net: U1.1 U1.2 U1.13 U3.3 U3.4 U3.5 U3.6 U3.7 U3.8 U3.12 U4.2 U4.3 U4.4 U4.8 U4.9 U4.10 U4.11 U4.14 U4.15 U4.16 U4.17 U4.27 U4.28 U4.29 U4.30 U4.33 U4.34 U4.35 U4.36 U4.37 U4.43 U4.50 U4.51 U4.52 U4.53 U4.54 U4.55 U4.56 U4.57 U4.61 U4.62 U5.5

## Polygon pours and split planes (outlines as drawn)
GND on Top Layer "GND_L01_P000" (solid, remove dead copper, pour order 0): 3605,3136.9 3605,4219.79 ccw(c3654.21,4219.79) 3654,4269 4736.89,4269 ccw(c4736.89,4219.79) 4786.1,4220 4786.1,3137.11 ccw(c4736.89,3137.11) 4737.1,3087.9 3654.21,3087.9 ccw(c3654.21,3137.11)
GND on Bottom Layer "GND_L02_P001" (solid, remove dead copper, pour order 1): 3605,3136.9 3605,4219.79 ccw(c3654.21,4219.79) 3654,4269 4736.89,4269 ccw(c4736.89,4219.79) 4786.1,4220 4786.1,3137.11 ccw(c4736.89,3137.11) 4737.1,3087.9 3654.21,3087.9 ccw(c3654.21,3137.11)

## Keep-outs
Keep-Out Layer:
  the board outline again, w10

## Other copper
Top Layer:
  pour cut-out: 4648.31,3137.11 ccw(c4736.89,3137.11) 4736.89,3048.53 ccw(c4736.89,3137.11) 4825.47,3137.11 ccw(c4736.89,3137.11) 4736.89,3225.69 ccw(c4736.89,3137.11)
  pour cut-out: 3565.63,3137.11 ccw(c3654.21,3137.11) 3654.21,3048.53 ccw(c3654.21,3137.11) 3742.8,3137.11 ccw(c3654.21,3137.11) 3654.21,3225.69 ccw(c3654.21,3137.11)
  pour cut-out: 4648.31,4219.79 ccw(c4736.89,4219.79) 4736.89,4131.2 ccw(c4736.89,4219.79) 4825.47,4219.79 ccw(c4736.89,4219.79) 4736.89,4308.37 ccw(c4736.89,4219.79)
  pour cut-out: 3654.21,4131.2 cw(c3654.21,4219.79) 3565.63,4219.79 cw(c3654.21,4219.79) 3654.21,4308.37 cw(c3654.21,4219.79) 3742.8,4219.79 cw(c3654.21,4219.79)
Bottom Layer:
  pour cut-out: 3654.21,4131.2 cw(c3654.21,4219.79) 3565.63,4219.79 cw(c3654.21,4219.79) 3654.21,4308.37 cw(c3654.21,4219.79) 3742.8,4219.79 cw(c3654.21,4219.79)
  pour cut-out: 4648.31,4219.79 ccw(c4736.89,4219.79) 4736.89,4131.2 ccw(c4736.89,4219.79) 4825.47,4219.79 ccw(c4736.89,4219.79) 4736.89,4308.37 ccw(c4736.89,4219.79)
  pour cut-out: 4648.31,3137.11 ccw(c4736.89,3137.11) 4736.89,3048.53 ccw(c4736.89,3137.11) 4825.47,3137.11 ccw(c4736.89,3137.11) 4736.89,3225.69 ccw(c4736.89,3137.11)
  pour cut-out: 3565.63,3137.11 ccw(c3654.21,3137.11) 3654.21,3048.53 ccw(c3654.21,3137.11) 3742.8,3137.11 ccw(c3654.21,3137.11) 3654.21,3225.69 ccw(c3654.21,3137.11)

## Silkscreen, mask and mechanical layers (free items; w line width, h text height)
Bottom Overlay:
  text "3" at 3891.15,4154.39 h60 r180
  text "G" at 3942.15,4154.39 h60 r180
  text "C" at 3991.15,4154.39 h60 r180
  text "D" at 4040.07,4154.39 h60 r180
  text "T" at 4118.93,4154.39 h60 r180
  text "V" at 4375.19,4150.39 h60 r180
  text "G" at 4424.19,4150.39 h60 r180
  text "D" at 4475.07,4150.39 h60 r180
  text "C" at 4529.07,4150.39 h60 r180
  text "L" at 4179.58,3296.73 h60
  text "V" at 4031.81,3295.61 h60
  text "G" at 4081.81,3295.61 h60
  text "H" at 4133.85,3295.61 h60
Mechanical 15:
  circle w10: c4459,3165 r157.48